# Altium PCB sonar_DAQ _old.PcbDoc
Units mil, origin at the board's own origin, x right, y up, seen from the top; angles counter-clockwise.
Board outline 3500 x 3500 mil, 2 copper layers (Top Layer, Bottom Layer); 76 components, 45 nets, 217 pads, 50 vias.
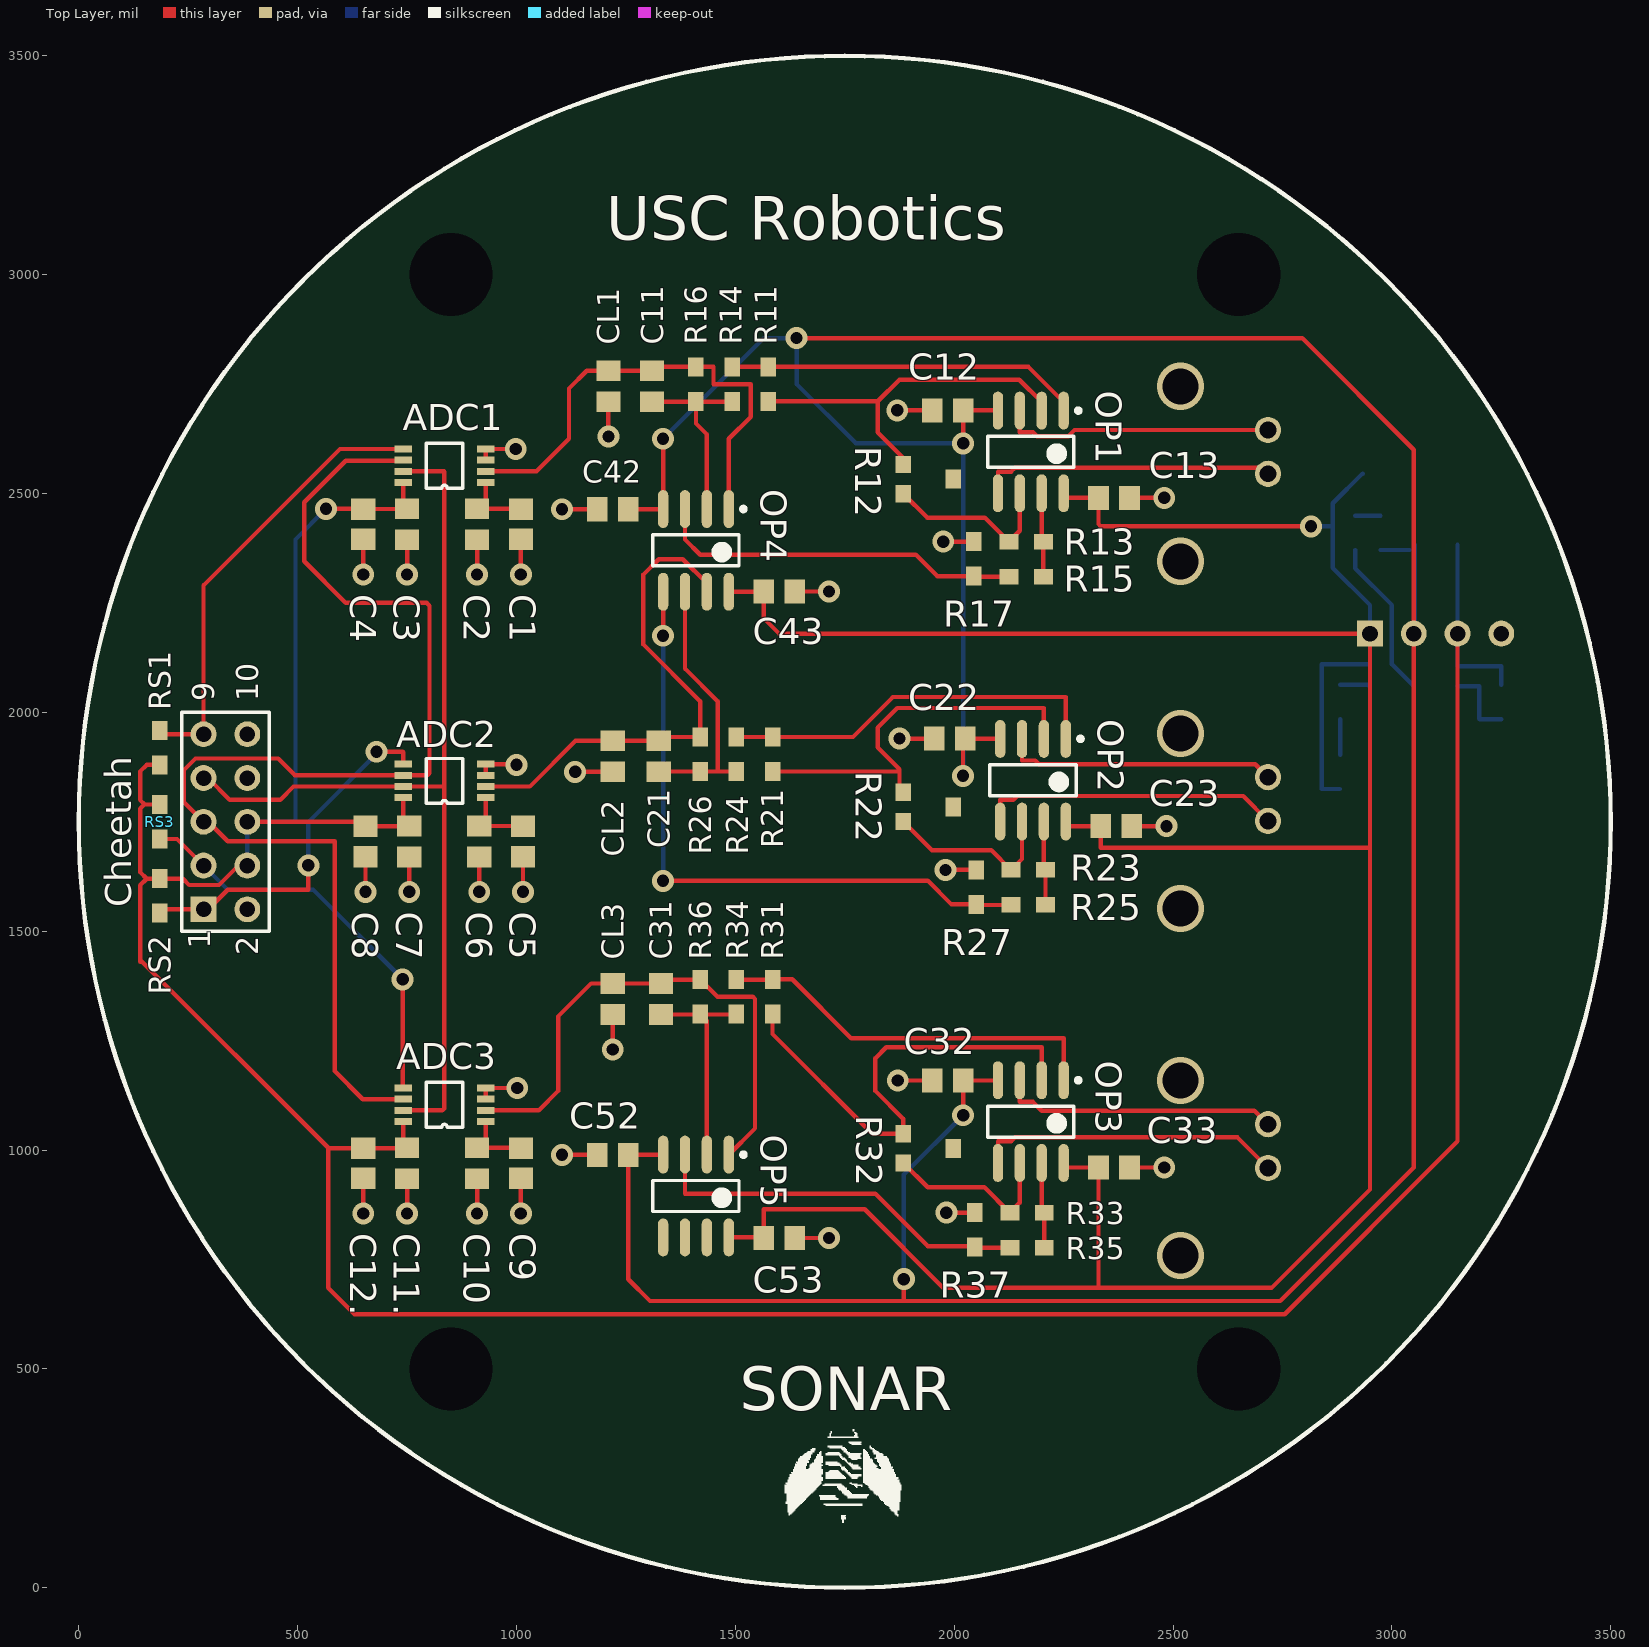
[diagram p0: Top Layer view]
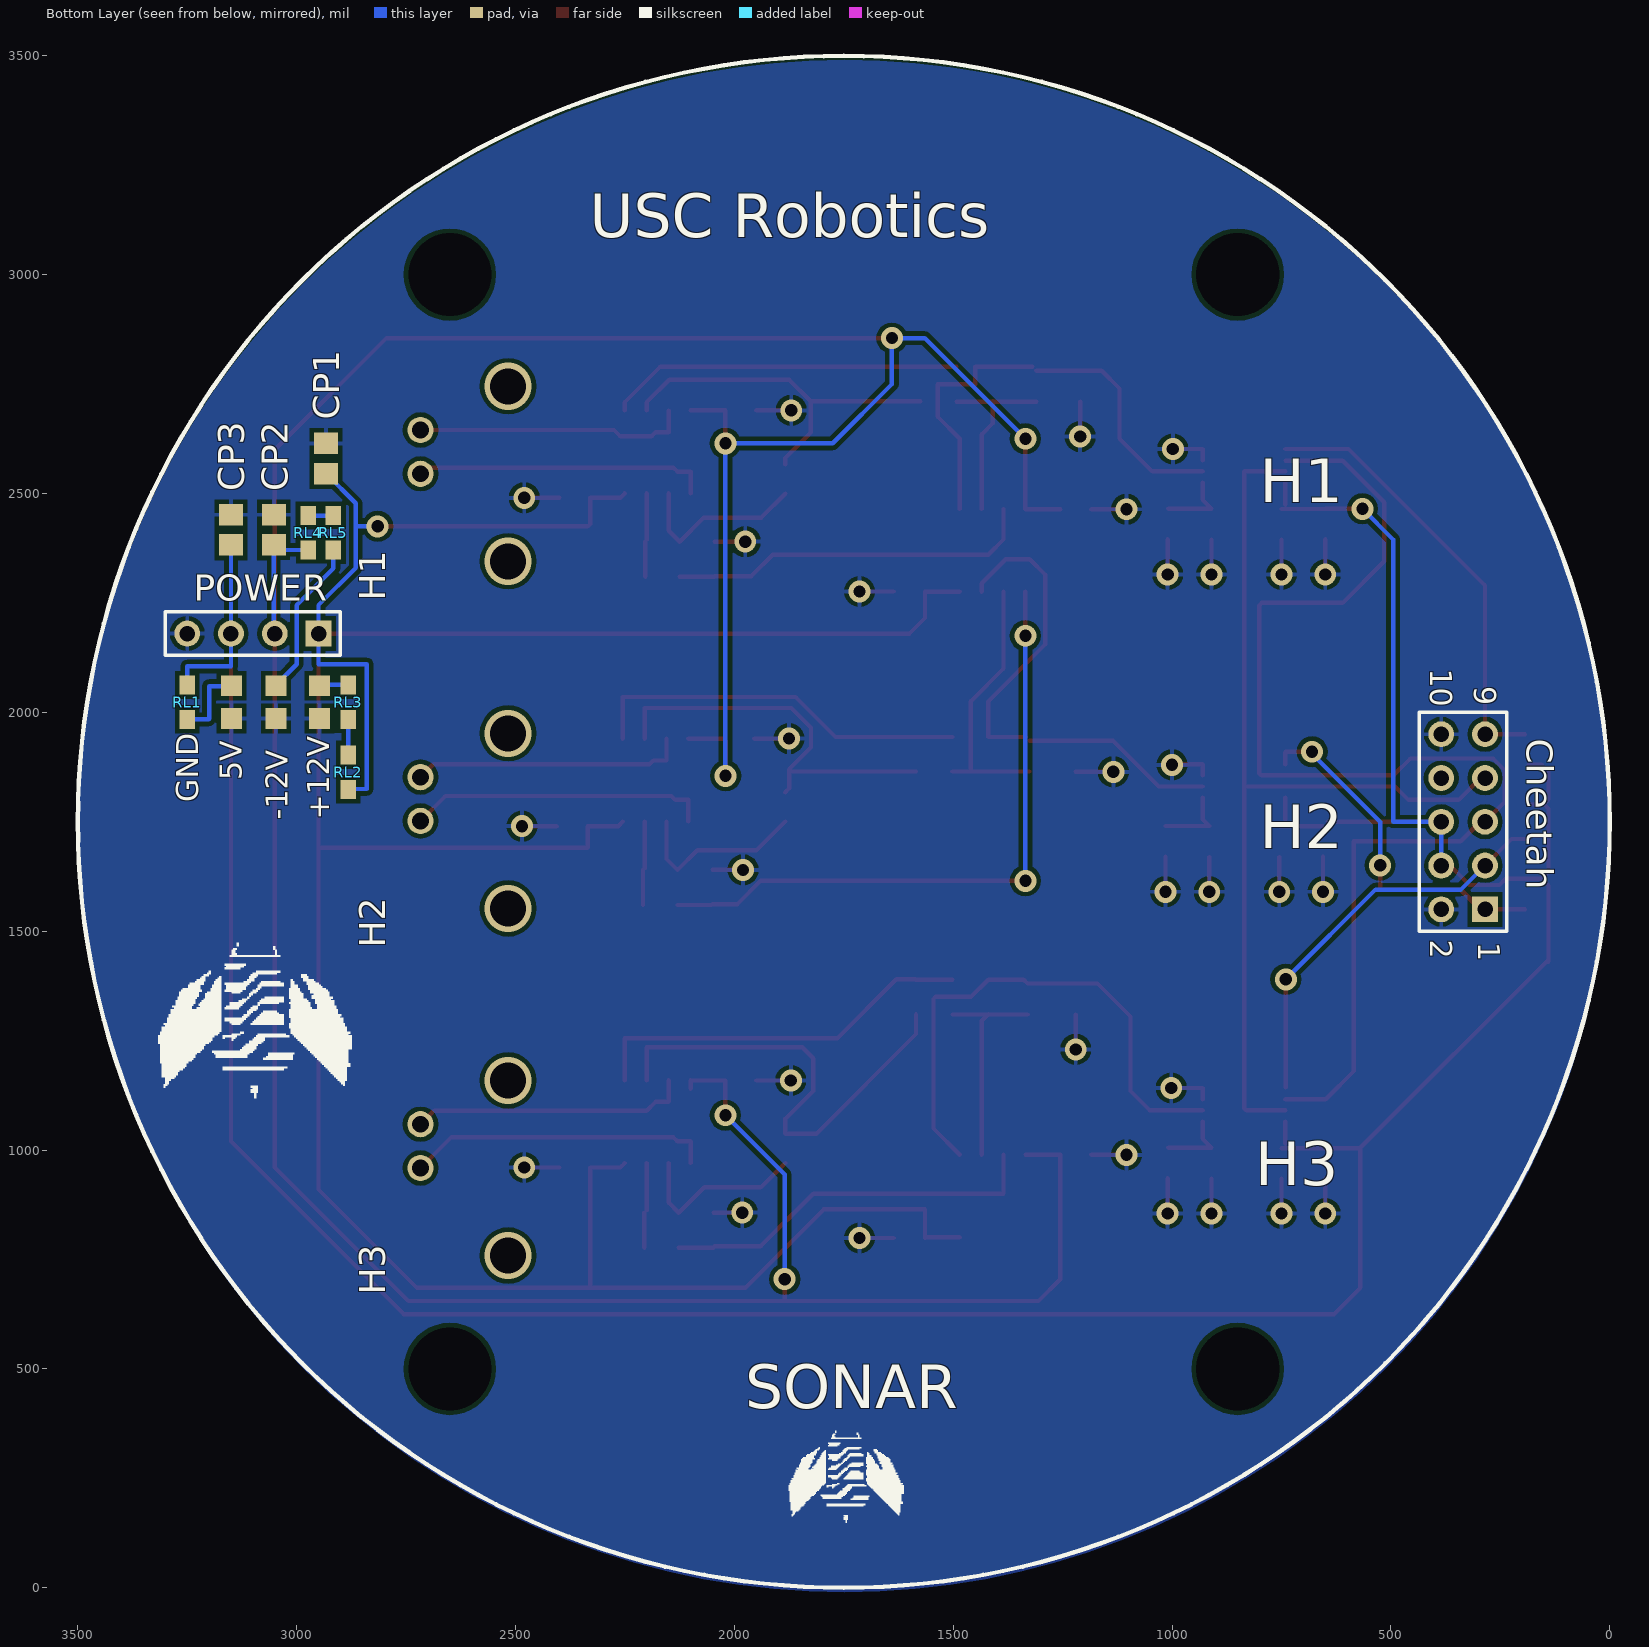
[diagram p1: Bottom Layer view, seen from below]

## Layer stack, top to bottom
Top Layer: signal copper 1.4
Dielectric: dielectric 12.6, FR-4, Dk 4.8
Bottom Layer: signal copper 1.4

## Board outline
1750,0 cw(c1750,1750) 0,1750 cw(c1750,1750) 1750,3500 cw(c1750,1750) 3500,1750 cw(c1750,1750)

## Design rules (kind name [scope] priority, off if disabled: settings)
Clearance [All] p1: gap=7
DiffPairsRouting [All] p1: maxlimit=10 minlimit=10 mostfreqgap=10 maxuncoupledlength=500
MinimumSolderMaskSliver [All] p1: minsoldermaskwidth=0
PolygonConnect [All] p1: connectstyle=Relief reliefconductorwidth=10 reliefentries=4 polygonreliefangle="90 Angle"
RoomDefinition sonar_DAQ [InComponentClass('sonar_DAQ')] p1: confinementstyle=ConfineIn formatcopy=TRUE lockcomponents=FALSE outline 0,0 8940,0 8940,6925 0,6925
RoutingVias [All] p1: holewidth=28 width=50 viastyle="Through Hole" minholewidth=28 minwidth=50 maxholewidth=28 maxwidth=50
SilkscreenOverComponentPads [All] p1: minsilkscreentomaskgap=10
SolderMaskExpansion [All] p1: expansion=4
TestPointUsage [All] p1: valid=0 allowmultiple=FALSE
Testpoint [All] p1: side=15 testpointundercomponent=TRUE minsize=40 maxsize=100 preferedsize=60 minholesize=0 maxholesize=40 preferedholesize=32 testpointgrid=1 style=1023 order=0123456789
Width [All] p1: maxlimit=10 minlimit=10 preferedwidth=10
21 further rules are at their usual default settings.

## Classes and differential pairs
differential pair H3: +H3_P -H3_N
differential pair H2: +H2_P -H2_N
differential pair H1: +H1_P -H1_N

## Components (designator, comment, footprint, x,y, rotation, side; value= is the part's Value field where it differs from the comment)
5V "LED3" 0805_led 3149,2060.8 r270 bottom
+12V "LED3" 0805_led 2948,2060.8 r270 bottom
-12V "LED3" 0805_led 3047,1986 r90 bottom
ADC1 "ADC" ADC 930,2525 r180 top
ADC2 "ADC" ADC 930,1805 r180 top
ADC3 "ADC" ADC 930,1065 r180 top
C1 "2.2u" 0805_tantalum_cap 1010,2430 r270 top
C2 ".1u" 0805_ceramic_cap 910,2430 r270 top
C3 ".1u" 0805_ceramic_cap 750,2430 r270 top
C4 "10u" 0805_tantalum_cap 650,2430 r270 top
C5 "2.2u" 0805_tantalum_cap 1015,1705 r270 top
C6 ".1u" 0805_ceramic_cap 915,1705 r270 top
C7 ".1u" 0805_ceramic_cap 755,1705 r270 top
C8 "10u" 0805_tantalum_cap 655,1705 r270 top
C9 "2.2u" 0805_tantalum_cap 1010,970 r270 top
C10 ".1u" 0805_ceramic_cap 910,970 r270 top
C11 "Cap" 0805_ceramic_cap 1310,2745 r270 top
C11. ".1u" 0805_ceramic_cap 750,970 r270 top
C12 "Cap" 0805_ceramic_cap 1985,2690 r0 top
C12. "10u" 0805_tantalum_cap 650,970 r270 top
C13 "Cap" 0805_ceramic_cap 2365,2490 r180 top
C21 "Cap" 0805_ceramic_cap 1325,1899.51 r270 top
C22 "Cap" 0805_ceramic_cap 1990,1940 r0 top
C23 "Cap" 0805_ceramic_cap 2370,1740 r180 top
C31 "Cap" 0805_ceramic_cap 1330,1345 r270 top
C32 "Cap" 0805_ceramic_cap 1985,1159 r0 top
C33 "Cap" 0805_ceramic_cap 2365,960 r180 top
C42 "Cap" 0805_ceramic_cap 1220,2464 r0 top
C43 "Cap" 0805_ceramic_cap 1600,2276 r180 top
C52 "Cap" 0805_ceramic_cap 1220,989 r0 top
C53 "Cap" 0805_ceramic_cap 1600,799 r180 top
Cheetah "Header 5X2" HDR2X5 285,1550 r90 bottom
CL1 "Cap" 0805_ceramic_cap 1210,2745 r270 top
CL2 "Cap" 0805_ceramic_cap 1220,1899.51 r270 top
CL3 "Cap" 0805_ceramic_cap 1220,1345 r270 top
CP1 "10u" 0805_tantalum_cap 2933,2580 r90 bottom
CP2 "10u" 0805_tantalum_cap 3052,2417 r90 bottom
CP3 "10u" 0805_tantalum_cap 3150,2417 r90 bottom
H1 "BNC" BNC 2717,2545 r90 bottom
H2 "BNC" BNC 2717,1752 r90 bottom
H3 "BNC" BNC 2717,959 r90 bottom
OP1 "LT1113 Dual Opamp" lt1113_opamp 2175,2595 r270 top
OP2 "LT1113 Dual Opamp" lt1113_opamp 2180,1845 r270 top
OP3 "LT1113 Dual Opamp" lt1113_opamp 2175,1065 r270 top
OP4 "LT1113 Dual Opamp" lt1113_opamp 1410,2370 r270 top
OP5 "LT1113 Dual Opamp" lt1113_opamp 1410,895 r270 top
POWER "Header 4" HDR1X4 2950,2180 r0 bottom
R11 "Res1" 0805_res 1575,2710.49 r90 top
R12 "RPot" trimmer_pot 1998,2533 r270 top
R13 "Res1" 0805_res 2125,2390 r0 top
R14 "Res1" 0805_res 1492.5,2710.49 r90 top
R15 "Res1" 0805_res 2125,2310 r0 top
R16 "Res1" 0805_res 1410,2789.23 r270 top
R17 "Res1" 0805_res 2045,2390 r270 top
R21 "Res1" 0805_res 1585,1865 r90 top
R22 "RPot" trimmer_pot 1998,1784 r270 top
R23 "Res1" 0805_res 2130,1640 r0 top
R24 "Res1" 0805_res 1502.5,1865 r90 top
R25 "Res1" 0805_res 2130,1560 r0 top
R26 "Res1" 0805_res 1420,1943.74 r270 top
R27 "Res1" 0805_res 2050,1640 r270 top
R31 "Res1" 0805_res 1585,1310.49 r90 top
R32 "RPot" trimmer_pot 1998,1004 r270 top
R33 "Res1" 0805_res 2127,857 r0 top
R34 "Res1" 0805_res 1502.5,1310.49 r90 top
R35 "Res1" 0805_res 2127,777 r0 top
R36 "Res1" 0805_res 1420,1389.23 r270 top
R37 "Res1" 0805_res 2047,857 r270 top
RL1 "Res3" 0805_res 3250,1984.03 r90 bottom
RL2 "Res3" 0805_res 2882,1903 r270 bottom
RL3 "Res3" 0805_res 2882,2062.77 r270 bottom
RL4 "Res3" 0805_res 2974,2449.54 r270 bottom
RL5 "Res3" 0805_res 2916,2370.8 r90 bottom
RS1 "Res1" 0805_res 185,1880 r90 top
RS2 "Res1" 0805_res 185,1620 r270 top
RS3 "Res1" 0805_res 185,1789.37 r270 top

## Footprints (in the part's own frame and the unit in brackets; to place one, negate y for a bottom-side part, rotate by r counter-clockwise, add the part's x,y. Pads: shape width x height; smd on the part's side, far side on the other; paste and mask are expansions set on the pad)
0805_ceramic_cap [mm] "Murata"
  rect 1.2x1.4 smd: 1(-0.9,0) 2(0.9,0)
  body extent -1.05,-0.67 1.05,0.67, height 1.26
0805_led [mm]
  rect 1.2x1.2 smd: 1(0,0) 2(1.9,0)
0805_res [mm]
  rect 1.1x0.9 smd: 1(0,0) 2(2,0)
0805_tantalum_cap [mm] "F92 Nichicon"
  rect 1.25x1.4 smd: 1(-0.875,0) 2(0.875,0)
  body extent -1.1,-0.67 1.1,0.67, height 1.2
ADC [mm]
  rect 1.02x0.41 smd: 1(0,0) 2(0,-0.65) 3(0,-1.3) 4(0,-1.95) 5(4.8,-1.95) 6(4.8,-1.3) 7(4.8,-0.65) 8(4.8,0)
  silkscreen extent 1.34,-2.28 3.46,0.33
BNC [mil]
  round 60 hole 38.19: 1(0,0) 2(100,0)
  body extent -300,-1800 300,50, height 635
HDR1X4 [mm] "Connector; Header; 4 Position"
  rect 1.5x1.5 hole 0.9: 1(0,0)
  round 1.5 hole 0.9: 2(2.54,0) 3(5.08,0) 4(7.62,0)
  silkscreen extent -1.27,-1.27 8.89,1.27
HDR2X5 [mm] "Connector; Header; 5x2 Position"
  rect 1.5x1.5 hole 0.9: 1(0,0)
  round 1.5 hole 0.9: 2(0,2.54) 3(2.54,0) 4(2.54,2.54) 5(5.08,0) 6(5.08,2.54) 7(7.62,0) 8(7.62,2.54) 9(10.16,0) 10(10.16,2.54)
  silkscreen extent -1.27,-1.27 11.43,3.81
lt1113_opamp [mm] "SOIC, 8-Leads, Body 5.0x4.0mm (max), Pitch 1.27mm, IPC Medium Density"
  oval 2.2x0.6 smd: 1(-2.4,1.905) 2(-2.4,0.635) 3(-2.4,-0.635) 4(-2.4,-1.905) 5(2.4,-1.905) 6(2.4,-0.635) 7(2.4,0.635) 8(2.4,1.905)
  silkscreen extent -2.52,-2.5 0.9,2.88, body extent -1.99,-2.52 1.99,2.52, height 1.75
trimmer_pot [mm]
  rect 1x0.9 smd: 1(-0.85,-2.9) 2(0.85,-2.9)
  rect 1.1x0.9 smd: 3(0,0)

## Part data
5V +12V -12V: "Typical BLUE SiC LED"
ADC1 ADC2 ADC3: "ADS7835"
C1 C2 C3 C4 C5 C6 C7 C8 C9 C10 C11. C12. CP1 CP2 CP3: library part Cap, "Capacitor"
C11 C12 C13 C21 C22 C23 C31 C32 C33 C42 C43 C52 C53 CL1 CL2 CL3: "Capacitor"
Cheetah: "Header, 5-Pin, Dual row"
H1 H2 H3: "BNC Elbow Connector"
OP1 OP2 OP3 OP4 OP5: library part "LT1113 OPAMP"
POWER: "Header, 4-Pin"
R11 R13 R14 R15 R16 R17 R21 R23 R24 R25 R26 R27 R31 R33 R34 R35 R36 R37 RL1 RL2 RL3 RL4 RL5 RS1 RS2 RS3: "Resistor"
R12 R22 R32: "Potentiometer"

## Free pads (board coordinates)
  round 100 hole 190: ""(850,500) ""(850,3000) ""(2650,500) ""(2650,3000)

## Via types
v1: diameter 50, hole 28, Top Layer to Bottom Layer, 44 vias
v2: diameter 107.87, hole 82.28, Top Layer to Bottom Layer, 6 vias

## Nets (pads, with @x,y where several pads share a name; then routed paths per layer and width w, separated by ;. In a path a pad name is that pad's centre, name@x,y a point inside that pad or via, vN(x,y) a via of type N, cw(c..) or ccw(c..) an arc to the next point about the centre after c; other vN are vias at no path point)
5V: ADC1.8 ADC2.8 ADC3.8 C3.1 C4.1 C7.1 C8.1 C11..1 C12..1 Cheetah.4 Cheetah.6 CP3.1 POWER.3 RL1.2 RS1.1 RS2.1 RS3.1 | length 7890.6
  Top Layer w10: 140,1430 140,1435 ; RS3.1 150.63,1789.37 ; RS1.1 155,1880 140,1865 140,1800 150.63,1789.37 ; Cheetah.4 365,1650 320.47,1605.47 252.03,1605.47 237.5,1620 RS2.1 155,1620 ; Cheetah.6 C8.1@644.45,1750 ; v1(565,2465) C4.1@649.45,2465 ; 570,1000 570,685 630,625 2755,625 3150,1020 POWER.3 ; 570,1005 140,1435 ; 574.45,1004.45 C12..1 C11..1@749.02,1004.45 ; C4.1 C3.1@749.02,2464.45 ; C8.1 C7.1@754.02,1739.45 ; C11..1@741.02,1014.41 ADC3.8 ; C7.1@741.02,1754.41 ADC2.8 ; C3.1@741.02,2474.41 ADC1.8 ; 140,1435 140,1605 155,1620 ; 150.63,1789.37 149.37,1789.37 140,1780 140,1635 155,1620
  Bottom Layer w10: Cheetah.4 Cheetah.6 495,1750 495,2395 v1(565,2465) ; CP3.1 POWER.3 3150,2105 3250,2105 RL1.2
+12V: C13.2 C23.2 C33.2 C43.2 C53.2 CP1.1 OP1.8 OP2.8 OP3.8 OP4.8 OP5.8 POWER.1 RL2.2 | length 7225.3
  Top Layer w10: OP5.8 C53.2@1563.06,800.51 ; OP4.8 C43.2@1564.08,2275.51 ; C53.2 1564.57,864.57 1795.43,864.57 1975,685 2330,685 ; C43.2 1564.57,2215.43 1600,2180 POWER.1 2950,910 2725,685 2330,685 ; OP3.8 2260.51,960 C33.2 2329.57,685.43 2330,685 ; OP1.8 2260.51,2490 C13.2 2329.57,2430.43 2335,2425 v1@2795,2425 ; OP2.8 2265.51,1740 C23.2 2334.57,1690.43 2949.57,1690.43 ; 2345,685 2330,685
  Bottom Layer w10: v1(2815,2425) 2865,2425 ; RL2.2@2881.26,1825 2840,1825 2840,2110 2950,2110 POWER.1 2950,2245 2865,2330 2865,2425 ; CP1.1 2865,2477.55 2865,2425
-12V: C12.2 C22.2 C32.2 C42.2 C52.2 CP2.1 OP1.4 OP2.4 OP3.4 OP4.4 OP5.4 POWER.2 RL4.2 | length 8640.9
  Top Layer w10: C42.2 OP4.4@1334.51,2464 ; OP5.4@1334.51,989 C52.2 1255.43,704.57 1305,655 1885,655 ; OP4.4 v1(1335,2625) ; v1(1640,2855) 2795,2855 3050,2600 POWER.2 3050,960 2745,655 1885,655 ; v1(1885,705) 1885,655 ; v1(2020,1855) C22.2@2020,1934.57 ; v1(2020.43,1079.57) C32.2 OP3.4@2099.51,1159 ; v1(2020.43,2614.57) C12.2 2099.49,2690 OP1.4 ; C22.2@2025.94,1939.49 OP2.4 ; OP3.4@2100,1140.08 OP3.4
  Bottom Layer w10: v1(1335,2625) 1565,2855 v1(1640,2855) 1640,2750 1775.43,2614.57 v1(2020.43,2614.57) 2020.43,1855.43 v1(2020,1855) ; v1(1885,705) 1885,944.13 v1(2020.43,1079.57) ; RL4.2 CP2.1@3040.25,2370.8 ; POWER.2@3052,2182 CP2.1
GND: 5V.2 +12V.2 -12V.1 ADC1.3 ADC1.4 ADC2.3 ADC2.4 ADC3.3 ADC3.4 C1.2 C2.2 C3.2 C4.2 C5.2 C6.2 C7.2 C8.2 C9.2 C10.2 C11..2 C12.1 C12..2 C13.1 C22.1 C23.1 C32.1 C33.1 C42.1 C43.1 C52.1 C53.1 Cheetah.2 Cheetah.10 CL1.2 CL2.2 CL3.2 CP1.2 CP2.2 CP3.2 POWER.4 R17.1 R27.1 R37.1 | length 2489
  Top Layer w10: v1(650,855) C12..2 ; v1(650,2315) C4.2 ; v1(655,1590) C8.2 ; v1(750,855) C11..2 ; v1(750,2315) C3.2 ; v1(755,1590) C7.2 ; v1(910,855) C10.2 ; v1(910,2315) C2.2 ; v1(915,1590) C6.2 ; ADC3.3 ADC3.4 v1(1001.77,1141.77) ; ADC2.3 ADC2.4 v1@996.77,1881.77 ; ADC1.3 ADC1.4 v1(998.23,2601.77) ; v1(1010,855) C9.2 ; v1(1010,2315) C1.2 ; v1(1015,1590) C5.2 ; v1(1104,989) C52.1 ; v1(1104,2464) C42.1 ; v1(1134.08,1864.08) CL2.2 ; v1(1210,2630) CL1.2 ; v1(1220,1230) CL3.2 ; C53.1 v1(1714,799) ; C43.1 v1(1714,2276) ; v1(1870,2690) C12.1 ; v1(1871,1159) C32.1 ; v1(1875,1940) C22.1 ; v1(1975,2390) R17.1 ; v1(1980,1640) R27.1 ; v1(1982,857) R37.1 ; C33.1 v1(2480,960) ; C13.1 v1(2480,2490) ; C23.1 v1(2485,1740)
  other v1: 1000,1880
H1_N: H1.2 OP1.3 | length 625.9
  Top Layer w10: OP1.3 2150,2640 2180.08,2640 2188.89,2631.18 2261.11,2631.18 2274.92,2645 H1.2
H1_P: H1.1 OP1.5 | length 675.9
  Top Layer w10: OP1.5 2100,2550 2130.08,2550 2138.89,2558.82 2703.18,2558.82 H1.1
H2_N: H2.2 OP2.3 | length 627.2
  Top Layer w10: OP2.3 2155,1890 2185.08,1890 2193.89,1881.18 2687.82,1881.18 H2.2
H2_P: H2.1 OP2.5 | length 688.7
  Top Layer w10: OP2.5 2105,1800 2135.08,1800 2143.89,1808.82 2660.18,1808.82 H2.1
H3_N: H3.2 OP3.3 | length 637.6
  Top Layer w10: OP3.3 2150,1110 2180.08,1110 2200.01,1090.06 2685.94,1090.06 H3.2
H3_P: H3.1 OP3.5 | length 699.1
  Top Layer w10: OP3.5 2100,1020 2130.08,1020 2138.89,1028.82 2647.18,1028.82 H3.1
MISO: ADC1.6 ADC2.6 ADC3.6 Cheetah.5 | length 2862.4
  Top Layer w10: ADC1.6@739.84,2575 610,2575 515,2480 515,2345 610,2250 795,2250 801.18,2243.82 801.18,1861.18 796.18,1856.18 ADC2.6 493.82,1856.18 455.47,1894.53 266.56,1894.53 240.47,1868.44 240.47,1794.53 Cheetah.5 295.94,1750 340.47,1705.47 584.53,1705.47 584.53,1180.47 648.82,1116.18 ADC3.6
MOSI: Cheetah.8
Net5V_1: 5V.1 RL1.1 | length 175.6
  Bottom Layer w10: 5V.1@3149.8,2060 3200,2060 3200,1985 3200.97,1984.03 RL1.1
Net+12V_1: +12V.1 RL3.1 | length 66.8
  Bottom Layer w10: RL3.1 2946.03,2062.77 +12V.1
Net-12V_2: -12V.2 RL5.1 | length 362.1
  Bottom Layer w10: RL5.1 2916,2329 3000,2245 3000,2110 -12V.2@3047,2063
NetADC1_1: ADC1.1 C1.1 C2.1 | length 166.9
  Top Layer w10: ADC1.1 930,2485.43 C2.1 C1.1@1009.02,2465.43
NetADC1_2: ADC1.2 C11.1 CL1.1 OP4.1 R16.1 | length 1104.2
  Top Layer w10: ADC1.2 1045.59,2550.59 1120,2625 1120,2740 1160.43,2780.43 CL1.1 C11.1 ; C11.1@1318.8,2789.23 R16.1 ; R16.1@1410.77,2790 1450,2790 1450,2750 1535,2750 1535,2675 1485,2625 OP4.1
NetADC2_1: ADC2.1 C5.1 C6.1 | length 169.8
  Top Layer w10: ADC2.1 930,1755.43 C6.1 C5.1@1014.02,1740.43
NetADC2_2: ADC2.2 C21.1 CL2.1 OP4.7 R26.1 | length 1151.3
  Top Layer w10: ADC2.2 1030.59,1830.59 1134.94,1934.94 CL2.1 C21.1 ; C21.1@1333.8,1943.74 R26.1 1420,2025 1290,2155 1290,2315 1325,2350 1379.92,2350 1435,2294.92 OP4.7
NetADC3_1: ADC3.1 C9.1 C10.1 | length 166.9
  Top Layer w10: ADC3.1 930,1025.43 C10.1 C9.1@1009.02,1005.43
NetADC3_2: ADC3.2 C31.1 CL3.1 OP5.1 R36.1 | length 1237
  Top Layer w10: ADC3.2 1050.59,1090.59 1095,1135 1095,1305 1170.43,1380.43 CL3.1 C31.1 1338.8,1389.23 R36.1 1459.23,1350 1540,1350 1545,1345 1545,1049.49 OP5.1
NetC11_2: C11.2 OP4.2 R14.1 R16.2 | length 437.9
  Top Layer w10: C11.2 R16.2@1410,2709.57 ; R16.2 R16.2@1410,2709.57 ; OP4.2 1435,2635 1410,2660 R16.2@1410,2709.57 ; R14.1@1491.58,2709.57 R16.2@1410,2709.57
NetC21_2: C21.2 OP4.6 R24.1 R26.2 | length 618.2
  Top Layer w10: C21.2@1325.92,1865 R26.2 1460,1865 ; OP4.6 1385,2100 1460,2025 1460,1865 ; R24.1 1460,1865
NetC31_2: C31.2 OP5.2 R34.1 R36.2 | length 498.8
  Top Layer w10: C31.2 R34.1@1501.58,1309.57 ; R36.2 1435,1295.49 OP5.2
NetOP1_1: OP1.1 R11.2 R14.2 | length 810.2
  Top Layer w10: R14.2 R11.2 2169.67,2789.23 2250,2708.9 OP1.1
NetOP1_2: OP1.2 R11.1 R12.1 | length 854.3
  Top Layer w10: R11.1 1825.49,2710.49 ; R12.1 1883.83,2581.17 1825.49,2639.51 1825.49,2710.49 ; OP1.2 2200,2708.9 2148.9,2760 1875,2760 1825.49,2710.49
NetOP1_6: OP1.6 R12.2 R13.1 | length 407.4
  Top Layer w10: R12.2 1938.36,2445 2070,2445 R13.1 2150,2415 OP1.6
NetOP1_7: OP1.7 R13.2 R15.2 | length 186.8
  Top Layer w10: R13.2@2200,2393.74 OP1.7 ; R15.2 R13.2
NetOP2_1: OP2.1 R21.2 R24.2 | length 885.8
  Top Layer w10: R24.2 R21.2 1768.74,1943.74 1860,2035 2255,2035 OP2.1
NetOP2_2: OP2.2 R21.1 R22.1 | length 926.1
  Top Layer w10: R21.1 1870,1865 ; R22.1 1875,1826.29 1875,1870 1825,1920 1825,1965 1870,2010 2205,2010 OP2.2
NetOP2_6: OP2.6 R22.2 R23.1 | length 412.8
  Top Layer w10: R22.2 1949.36,1685 2085,1685 R23.1 2155,1665 OP2.6
NetOP2_7: OP2.7 R23.2 R25.2 | length 186.8
  Top Layer w10: R23.2@2205,1643.74 OP2.7 ; R25.2 R23.2
NetOP3_1: OP3.1 R31.2 R34.2 | length 898.2
  Top Layer w10: R34.2 R31.2 ; R31.2@1585.77,1390 1630,1390 1765,1255 2250,1255 OP3.1
NetOP3_2: OP3.2 R31.1 R32.1 | length 1103.4
  Top Layer w10: R31.1 1585,1265 1812.54,1037.46 R32.1 1883.83,1071.17 1820,1135 1820,1210 1845,1235 2200,1235 OP3.2
NetOP3_6: OP3.6 R32.2 R33.1 | length 413.2
  Top Layer w10: R32.2 1939.36,915 2069,915 R33.1 2150,880 OP3.6
NetOP3_7: OP3.7 R33.2 R35.2 | length 187.8
  Top Layer w10: R33.2@2200,862.74 OP3.7 ; R35.2 R33.2
NetOP4_3: OP4.3 R15.1 R17.2 | length 842.9
  Top Layer w10: OP4.3 1385,2395 1420,2360 1912.52,2360 1961.26,2311.26 R17.2 ; R17.2@2046.26,2310 R15.1
NetOP4_5: OP4.5 R25.1 R27.2 | length 1476.5
  Top Layer w10: v1(1335,1615) 1940,1615 1993.74,1561.26 R27.2 ; v1(1335,2175) OP4.5 ; R27.2@2051.26,1560 R25.1
  Bottom Layer w10: v1(1335,1615) v1(1335,2175)
NetOP5_3: OP5.3 R35.1 R37.2 | length 878.2
  Top Layer w10: OP5.3 1385,900 1820,900 1940,780 R37.2@2045.26,780 ; R37.2@2048.26,777 R35.1
NetRL2_1: RL2.1 RL3.2 | length 81
  Bottom Layer w10: RL2.1 RL3.2
NetRL4_1: RL4.1 RL5.2 | length 58
  Bottom Layer w10: RL5.2 RL4.1
SCLK: ADC1.7 ADC2.7 ADC3.7 Cheetah.7 | length 2227.8
  Top Layer w10: Cheetah.7 295,1850 345,1800 460,1800 490.59,1830.59 ADC2.7 834.41,1830.59 ; ADC3.7 830.59,1090.59 835,1095 835,2550 834.41,2550.59 ADC1.7
SS1: ADC1.5 Cheetah.9 RS1.2 | length 1016.4
  Top Layer w10: RS1.2@193.74,1950 Cheetah.9 285,2290 596.77,2601.77 ADC1.5
SS2: ADC2.5 Cheetah.1 RS2.2 | length 814.8
  Top Layer w10: RS2.2@193.74,1550 Cheetah.1 295.94,1550 340.47,1594.53 524.53,1594.53 v1(524.53,1650.47) ; v1(680,1910) 740,1910 ; ADC2.5 741.02,1908.98
  Bottom Layer w10: v1(524.53,1650.47) 524.53,1749.53 v1@682.5,1907.5
SS3: ADC3.5 Cheetah.3 RS3.2 | length 935
  Top Layer w10: RS3.2 224.37,1710.63 Cheetah.3 ; ADC3.5@740,1142.8 v1(740,1390)
  Bottom Layer w10: Cheetah.3 340,1595 535,1595 v1(740,1390)
pads on no net: OP5.5 OP5.6 OP5.7 R12.3 R22.3 R32.3
copper on no net:
  other v2: 2517,759 2517,1159 2517,1552 2517,1952 2517,2345 2517,2745

## Polygon pours and split planes (outlines as drawn)
GND on Bottom Layer "GNDBottom" (solid, pour order 1000): 1748.21,-9.7 cw(c1748.21,1740.3) -1.79,1740.3 cw(c1748.21,1740.3) 1748.21,3490.3 cw(c1748.21,1740.3) 3498.21,1740.3 cw(c1748.21,1740.3)

## Silkscreen, mask and mechanical layers (free items; w line width, h text height)
Top Overlay:
  drawing of 20 lines, arcs and shapes, not listed
  text "USC Robotics" at 1205,3080 h100
  text "9" at 310,2025 h50 r90
  text "10" at 410,2025 h50 r90
  text "Cheetah" at 120,1555 h60 r90
  text "1" at 300,1460 h50 r90
  text "2" at 410,1445 h50 r90
  text "SONAR" at 1510,405 h100
Bottom Overlay:
  drawing of 31 lines, arcs and shapes, not listed
  text "USC Robotics" at 2330,3085 h100
  text "H1" at 800,2480 h100
  text "GND" at 3225,1795 h50 r270
  text "H2" at 800,1690 h100
  text "H3" at 810,920 h100
  text "SONAR" at 1975,410 h100

## Text inside footprints (layer, text, board x,y; h text height)
Cheetah: Bottom Overlay "2" at 410,1480 h50 r90; Bottom Overlay "1" at 300,1475 h50 r90; Bottom Overlay "9" at 310,2060 h50 r90; Bottom Overlay "10" at 410,2100 h50 r90